# EAGLE board Handheld (EAGLE 9.6.1), part 1 of 2
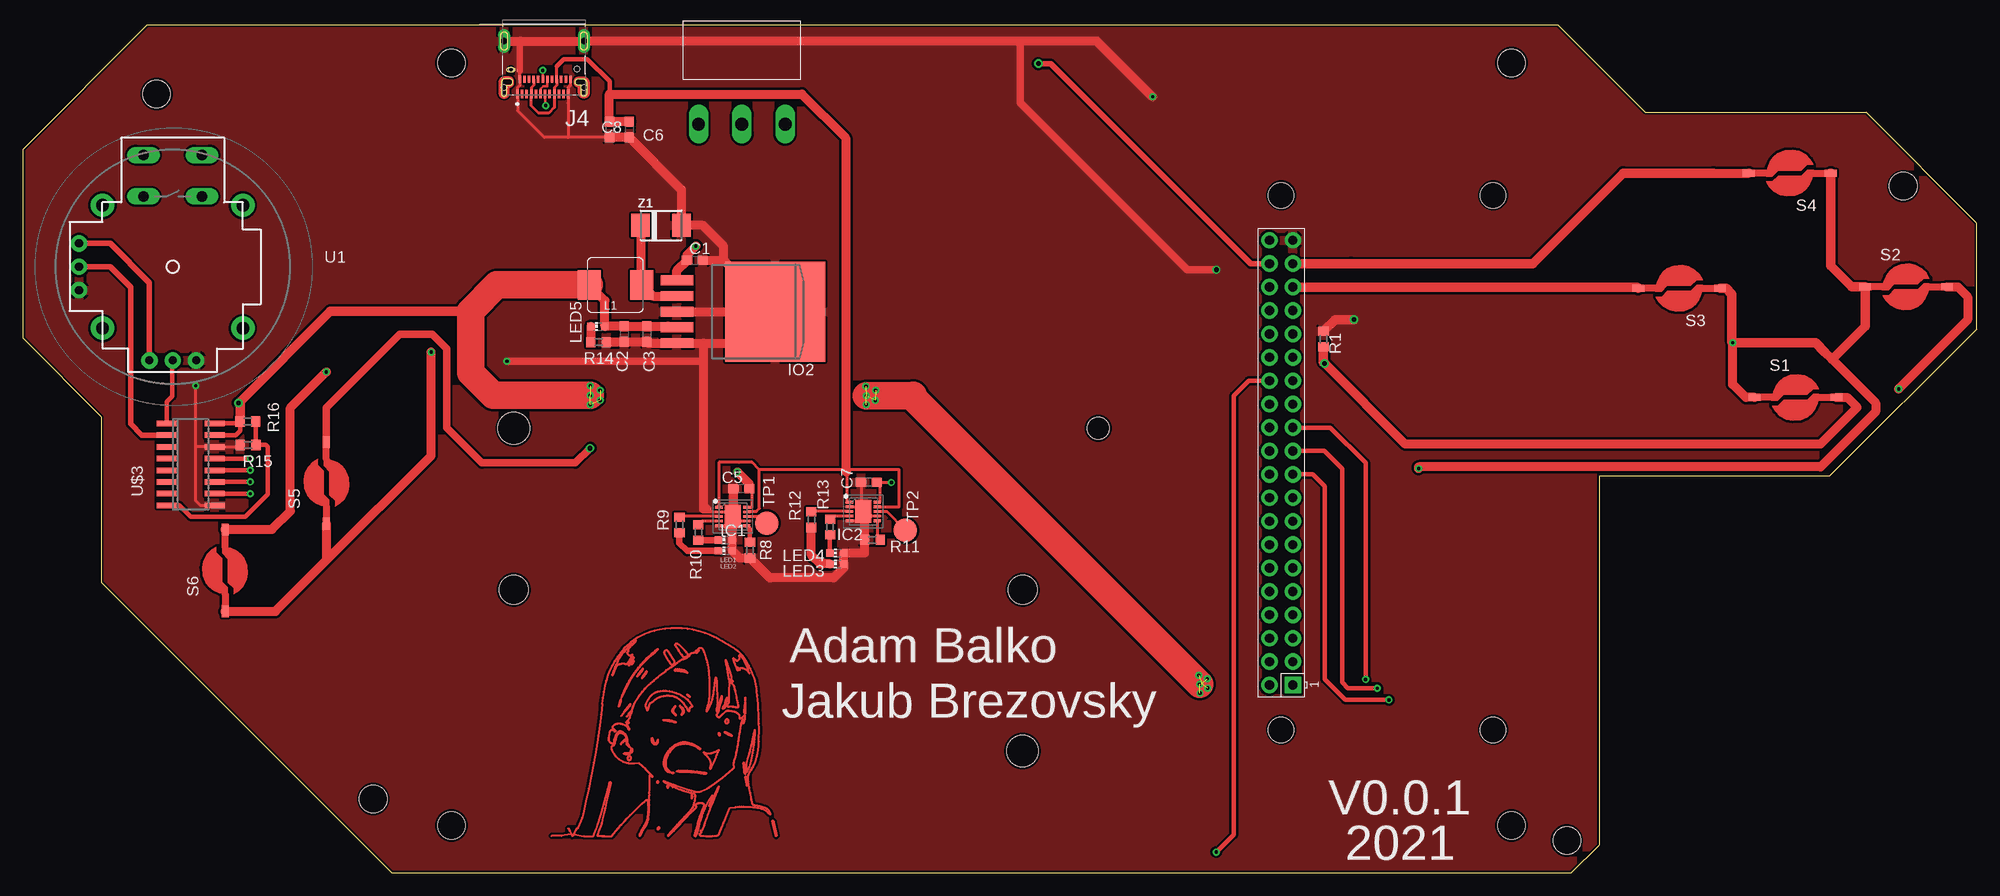
[diagram p0: board, top side]
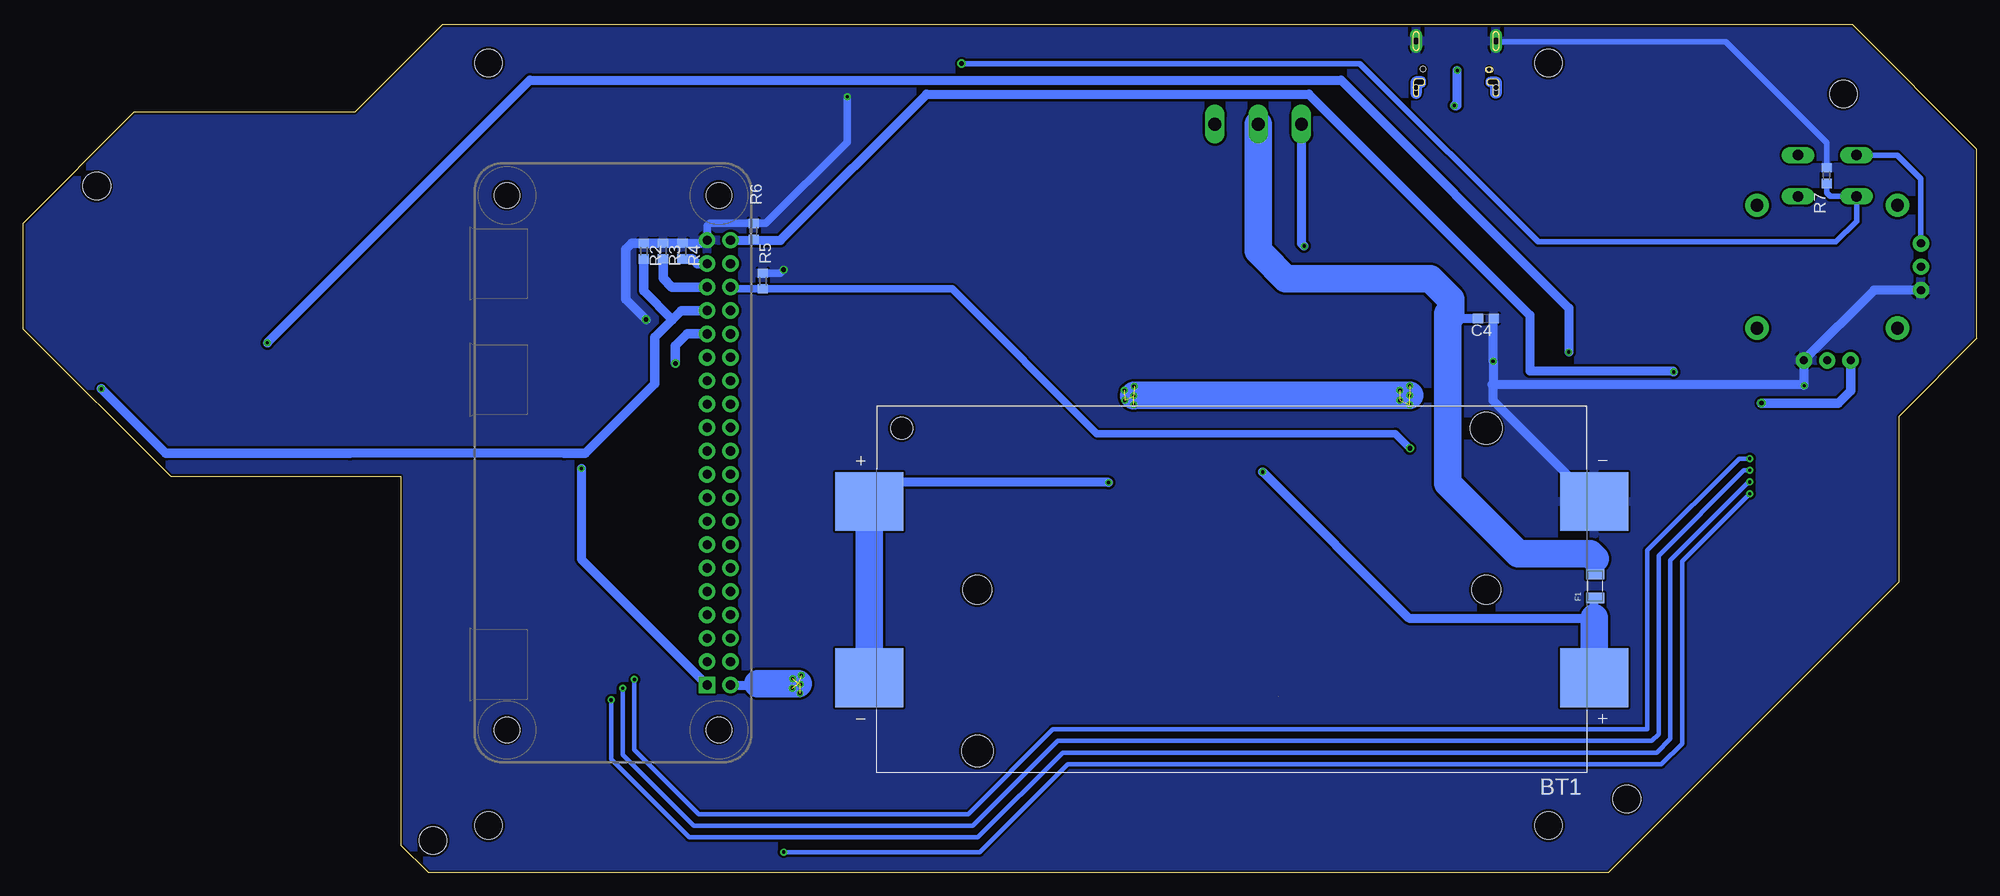
[diagram p1: board, bottom side, seen from below]

Size 212 x 92 mm. Coordinates in mm from the lower left corner, seen from the top.
Outline: 40,0 168,0 171,3 171,43 196,43 212,59 212,70.5 200,82.5 176,82.5 166.5,92 13.5,92 0,78.5 0,58 8.5,49.5 8.5,31.5 40,0
Copper layers (1*16): Top 0.035mm / dielectric 1.5mm / Bottom 0.035mm
Design rules "default *": minimum track width 6mil, minimum drill 0.35mm, track to track 10mil, track to pad 10mil, pad to pad 10mil, via to via 10mil, smd to smd 6mil, copper to edge 10mil, drill to drill 6mil, minimum pad ring 10mil, minimum via ring 8mil, stop-mask expansion 4mil, vias tented up to drill 0mil, thermal gap 10mil
Net classes: 2 90R_dif: width 0.147 mm, drill 0.25 mm, clearance 0.253 mm
Holes 3 mm at 14.5,84.5 38,8 204,74.5 167.5,3.5 161.5,5.13 161.5,87.87 46.5,87.87 46.5,5.13

## Footprints (pad centres in the part's own frame; a part is rotated, then mirrored left to right if it is on the bottom)
BAT_1048P = smd 7.34 x 6.35: 1+ -39.33,9.555; 1- 39.33,9.555; 2+ 39.33,-9.555; 2- -39.33,-9.555 | hole 3.17: -27.6,0; 27.6,0 | hole 3.45: -27.6,-17.505; 27.6,17.505 | hole 2.39: 35.82,-17.505
C0603 = smd 1.1 x 1: 1 -0.85,0; 2 0.85,0
3413.0113.22 = smd 1.1 x 2: 1 -1.3,0; 2 1.3,0
SON50P300X300X100-11N = smd 0.8 x 0.3: 1 -1.5,1; 2 -1.5,0.5; 3 -1.5,0; 4 -1.5,-0.5; 5 -1.5,-1; 6 1.5,-1; 7 1.5,-0.5; 8 1.5,0; 9 1.5,0.5; 10 1.5,1 | smd 1.75 x 2.5: 11 0,0
TO263-5 = smd 1.067 x 3.505: 1 -3.404,0.762; 2 -1.702,0.762; 3 0,0.762; 4 1.702,0.762; 5 3.404,0.762 | smd 10.82 x 10.82: 6 0,11.43
JAE_DX07S024JJ3R1300 = smd 0.27 x 0.9: A1 -2.625,2.7; A2 -2.125,2.7; A3 -1.625,2.7; A4 -1.125,2.7; A5 -0.625,2.7; A6 -0.125,2.7; A7 0.375,2.7; A8 0.875,2.7; A9 1.375,2.7; A10 1.875,2.7; A11 2.375,2.7; A12 2.875,2.7 | smd 0.27 x 0.8: B1 2.625,1.1; B2 2.125,1.1; B3 1.625,1.1; B4 1.125,1.1; B5 0.625,1.1; B6 0.125,1.1; B7 -0.375,1.1; B8 -0.875,1.1; B9 -1.375,1.1; B10 -1.875,1.1; B11 -2.375,1.1; B12 -2.875,1.1 | drill 0.7 pad 1.3 long: S1 -4.32,-3.05; S2 4.32,-3.05 | hole 0.6: -3.6,0; -4.32,2; 4.32,2 | hole 0.5: 3.6,0.065
INDUCTOR_L0630 = smd 2.5 x 3.2: 1 -2.85,0; 2 2.85,0
CHIP-LED0603 = smd 0.8 x 0.8: A 0,-0.75; C 0,0.75
R0603 = smd 1 x 1.1: 1 -0.85,0; 2 0.85,0
RASPBERRYPI_BASTELSTUBE_V13_RASPI_BOARD_B+_FULL = drill 1 pad 1.778 square: 1 8.37,25.23 | drill 1 pad 1.778: 2 8.37,27.77; 3 10.91,25.23; 4 10.91,27.77; 5 13.45,25.23; 6 13.45,27.77; 7 15.99,25.23; 8 15.99,27.77; 9 18.53,25.23; 10 18.53,27.77; 11 21.07,25.23; 12 21.07,27.77; 13 23.61,25.23; 14 23.61,27.77; 15 26.15,25.23; 16 26.15,27.77; 17 28.69,25.23; 18 28.69,27.77; 19 31.23,25.23; 20 31.23,27.77; 21 33.77,25.23; 22 33.77,27.77; 23 36.31,25.23; 24 36.31,27.77; 25 38.85,25.23; 26 38.85,27.77; 27 41.39,25.23; 28 41.39,27.77; 29 43.93,25.23; 30 43.93,27.77; 31 46.47,25.23; 32 46.47,27.77; 33 49.01,25.23; 34 49.01,27.77; 35 51.55,25.23; 36 51.55,27.77; 37 54.09,25.23; 38 54.09,27.77; 39 56.63,25.23; 40 56.63,27.77 | hole 2.75: 3.5,3.5; 3.5,26.5; 61.5,3.5; 61.5,26.5
BUTTON = smd 1.27 x 0.762: 1 -0.635,5.08; 2 8.255,5.08
B2,54 = smd 2.54 x 2.54: TP 0,0
JOYSTICK = drill 1.1 pad 1.778 long: B1A -3.175,12.12; B1B 3.175,12.12; B2A -3.175,7.62; B2B 3.175,7.62 | drill 0.889 pad 1.778: H1 -2.54,-10.16; H2 0,-10.16; H3 2.54,-10.16; V1 -10.16,2.54; V2 -10.16,0; V3 -10.16,-2.54 | drill 1.397 pad 2.54: MOUNT1 -7.62,6.668; MOUNT2 -7.62,-6.668; MOUNT3 7.62,-6.668; MOUNT4 7.62,6.668
SO16 = smd 0.6 x 2.2: 1 -4.445,-2.6; 2 -3.175,-2.6; 3 -1.905,-2.6; 4 -0.635,-2.6; 5 0.635,-2.6; 6 1.905,-2.6; 7 3.175,-2.6; 8 4.445,-2.6; 9 4.445,2.6; 10 3.175,2.6; 11 1.905,2.6; 12 0.635,2.6; 13 -0.635,2.6; 14 -1.905,2.6; 15 -3.175,2.6; 16 -4.445,2.6
1P2T = drill 1.397 pad 2.032 long: P$1 0,0; P$2 4.7,0; P$3 9.4,0
SUPRESSOR_SMAJ = smd 2 x 2.5: A 2.223,0; C -2.223,0

## Placement (x,y rotation side)
BT1  1048P  [BAT_1048P]  80.85,30.72 180 bottom
C1  330n  [C0603]  72.89,66.47 0 top
C2  220n  [C0603]  65.24,58.46 270 top
C3  100nF  [C0603]  67.66,58.46 270 top
C4  100n  [C0603]  53.29,60.13 180 bottom
C5  100nF  [C0603]  77.93,41.67 180 top
C6  100nF  [C0603]  65.78,80.65 270 top
C7  100nF  [C0603]  91.77,42.37 180 top
C8  100nF  [C0603]  63.63,80.64 270 top
F1  5A  [3413.0113.22]  41.41,31.11 90 bottom
IC1  BQ24080DRCR  [SON50P300X300X100-11N]  77.02,38.66 0 top
IC2  BQ24080DRCR  [SON50P300X300X100-11N]  91.18,39.21 0 top
IO2  LM2596S-5  [TO263-5]  70.18,60.88 270 top
J4  DX07S024JJ3R1300  [JAE_DX07S024JJ3R1300]  56.52,87.2 180 top
L1  22UH  [INDUCTOR_L0630]  64.26,63.78 180 top
LED1  [CHIP-LED0603]  76.2,34.94 90 top
LED2  [CHIP-LED0603]  76.2,36.13 90 top
LED3  [CHIP-LED0603]  88.3,33.52 90 top
LED4  [CHIP-LED0603]  88.3,34.71 90 top
LED5  [CHIP-LED0603]  62.37,59.29 90 top
R1  470  [R0603]  141.1,57.91 270 top
R2  470  [R0603]  144.63,67.44 270 bottom
R3  470  [R0603]  142.56,67.47 270 bottom
R4  470  [R0603]  140.46,67.45 270 bottom
R5  470  [R0603]  131.74,64.21 270 bottom
R6  470  [R0603]  132.73,69.61 270 bottom
R7  470  [R0603]  16.32,75.64 270 bottom
R8  1.13k  [R0603]  78.87,35.01 90 top
R9  470  [R0603]  71.22,37.74 90 top
R10  470  [R0603]  73.27,36.93 90 top
R11  1.13k  [R0603]  92.16,36.13 0 top
R12  470  [R0603]  85.53,38.31 90 top
R13  470  [R0603]  87.57,37.52 90 top
R14  470  [R0603]  62.44,57.57 0 top
R15  4.7k  [R0603]  24.41,46.42 180 top
R16  3k  [R0603]  24.4,48.97 0 top
RPI  RPI-ZERO  [RASPBERRYPI_BASTELSTUBE_V13_RASPI_BOARD_B+_FULL]  163,12 90 top
S1  BUTTON  [BUTTON]  188.5,46.5 0 top
S2  BUTTON  [BUTTON]  200.5,58.5 0 top
S3  BUTTON  [BUTTON]  183.5,68.5 180 top
S4  BUTTON  [BUTTON]  195.5,81 180 top
S5  BUTTON  [BUTTON]  38,38.5 90 top
S6  BUTTON  [BUTTON]  27,29 90 top
TP1  TPB2,54  [B2,54]  80.7,37.93 90 top
TP2  TPB2,54  [B2,54]  95.74,37.17 270 top
U1  JOYSTICKPTH  [JOYSTICK]  16.24,65.76 0 top
U$3  MCP3008SL  [SO16]  18.2,44.31 270 top
U$10  1P2T  [1P2T]  73.29,81.23 0 top
Z1  1n5824  [SUPRESSOR_SMAJ]  69.22,70.24 0 top

## Library data of the parts
BT1 = 1048P; AVAILABILITY: In Stock; DESCRIPTION: SMT Polarized Holder for Dual 18650 Batteries; MF: Keystone Electronics; MP: 1048P; PACKAGE: None; PRICE: None
C1-C8 = rcl; SPICEPREFIX: C
F1 = Fuse; CREATED_BY: PCBLayout.com; DIGIKEY_PARTNO: 486-1675-2-ND; MANUFACTURER: Schurter Inc.; MPN: 3413.0113.22
IC1 IC2 = BQ24080DRCR; DESCRIPTION: 1-cell Li-Ion Charger w/ 1-A FET, AC Present and Charge Enable; HEIGHT: 1mm; MANUFACTURER_NAME: Texas Instruments; MANUFACTURER_PART_NUMBER: BQ24080DRCR; MOUSER_PART_NUMBER: 595-BQ24080DRCR; MOUSER_PRICE-STOCK: https://www.mouser.co.uk/ProductDetail/Texas-Instruments/BQ24080DRCR?qs=LgZHeZZt5MU%2FyDpF9dIpWg%3D%3D
IO2 U$10 = TABOR K1
J4 = DX07S024JJ3R1300_OK; DESCRIPTION: USB-C (USB TYPE-C) USB 3.2 Gen 2 (USB 3.1 Gen 2, Superspeed + (USB 3.1)) Receptacle Connector 24 Position Surface Mount, Right Angle; Through Hole; DIGI-KEY_PART_NUMBER: 670-2846-1-ND; MF: JAE Electronics; MP: DX07S024JJ3R1300; PACKAGE: None; PURCHASE-URL: https://pricing.snapeda.com/search/part/DX07S024JJ3R1300/?ref=eda
L1 = BeagleBone_Blue_R3
LED1-LED5 = led
R1-R16 = rcl; SPICEPREFIX: R
RPI = RPI-Zero
S1-S6 = Button1
TP1 TP2 = testpad
U1 = adafruit
U$3 = MCP3008
Z1 = 52101-101-REV-A

## Nets
+3V3: RPI.1 S1.1 S2.1 S3.1 S4.1 S5.1 S6.1
+5V: C2.1 C3.1 IO2.4 L1.2 LED5.A R16.1 RPI.2 U1.B1A U1.H1 U1.V1 U$3.15 U$3.16
A: R1.2 RPI.31 S1.2
B: R2.2 RPI.33 S2.2
BAT_1: BT1.1+ C5.1 F1.1 IC1.10
BAT_2: BT1.1- BT1.2+ C7.1 IC2.10
BAT_OUT: C1.1 IO2.1 U$10.P$1
CS: RPI.28 U$3.10
FUSE: C4.2 F1.2 U$10.P$2
GND: BT1.2- C1.2 C2.2 C3.2 C4.1 C5.2 C6.2 C7.2 C8.2 IC1.2 IC1.5 IC1.7 IC1.11 IC2.2 IC2.5 IC2.7 IC2.11 IO2.3 IO2.5 IO2.6 J4.A1 J4.A12 J4.B1 J4.B12 J4.S1 J4.S2 LED1.A LED2.A LED3.A LED4.A R1.1 R2.1 R3.1 R4.1 R5.1 R6.1 R7.1 R8.1 R11.1 R14.2 R15.2 RPI.39 U1.H3 U1.V3 U$3.9 U$3.14 Z1.A
JS: R7.2 RPI.38 U1.B2A
MISO: RPI.21 U$3.12
MOSI: RPI.19 U$3.11
N$2: U1.H2 U$3.1
N$3: LED5.C R14.1
N$4: U1.V2 U$3.2
N$5: IC1.6 R8.2
N$6: IC1.4 R10.2
N$7: IC1.3 R9.2
N$8: LED1.C R9.1
N$9: LED2.C R10.1
N$11: IC2.6 R11.2
N$12: IC2.4 R13.2
N$13: IC2.3 R12.2
N$14: LED3.C R12.1
N$15: LED4.C R13.1
N$16: IC1.8 TP1.TP
N$17: IC2.8 TP2.TP
N$61: IO2.2 L1.1 Z1.C
SCLK: RPI.23 U$3.13
SELECT: R6.2 RPI.40 S6.2
START: R5.2 RPI.36 S5.2
USB_IN: C6.1 C8.1 IC1.1 IC1.9 IC2.1 IC2.9 J4.A4 J4.A9 J4.B4 J4.B9
USB_OUT_3_N [90R_dif]: J4.A7 J4.B7
USB_OUT_3_P [90R_dif]: J4.A6 J4.B6
V_DEL: R15.1 R16.2 U$3.8
X: R3.2 RPI.35 S3.2
Y: R4.2 RPI.37 S4.2